# Altium PCB PCB1.PcbDoc
Units mil, origin at the board's own origin, x right, y up, seen from the top; angles counter-clockwise.
Board outline 6000 x 4000 mil, 2 copper layers (Top Layer, Bottom Layer); 45 components, 30 nets, 183 pads, 5 vias.
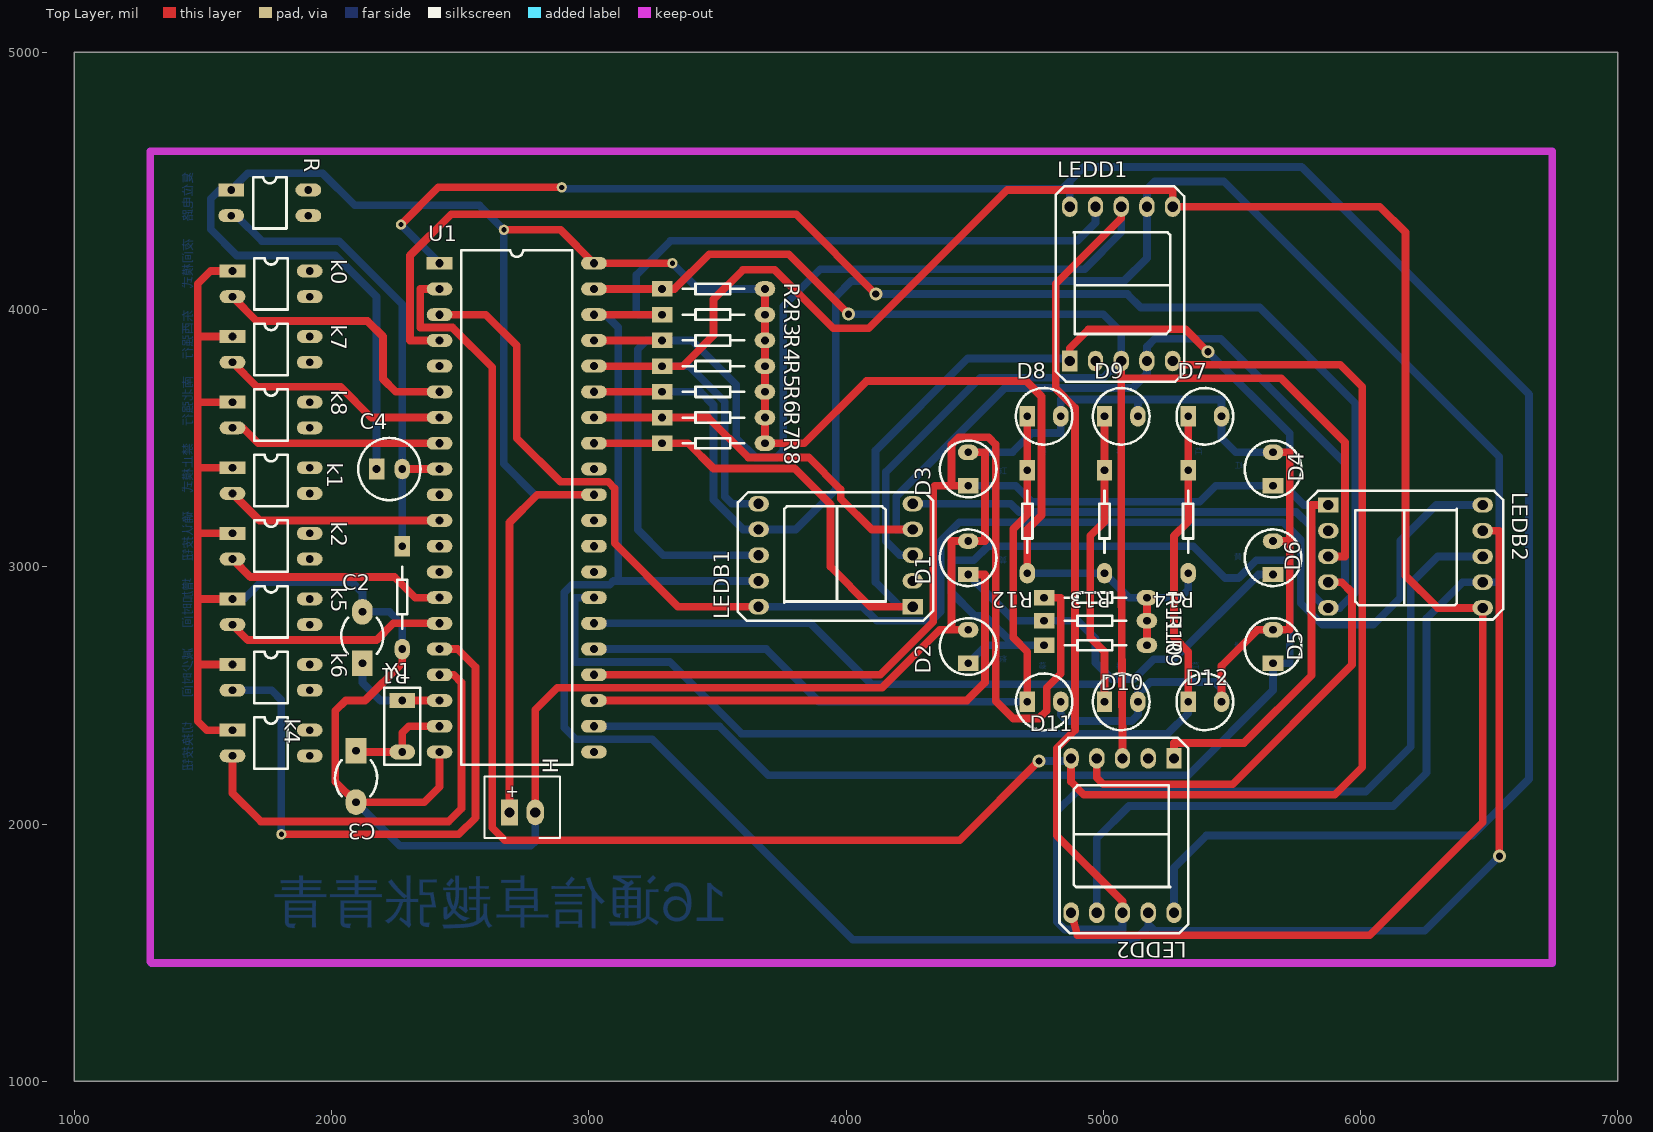
[diagram p0: Top Layer view]
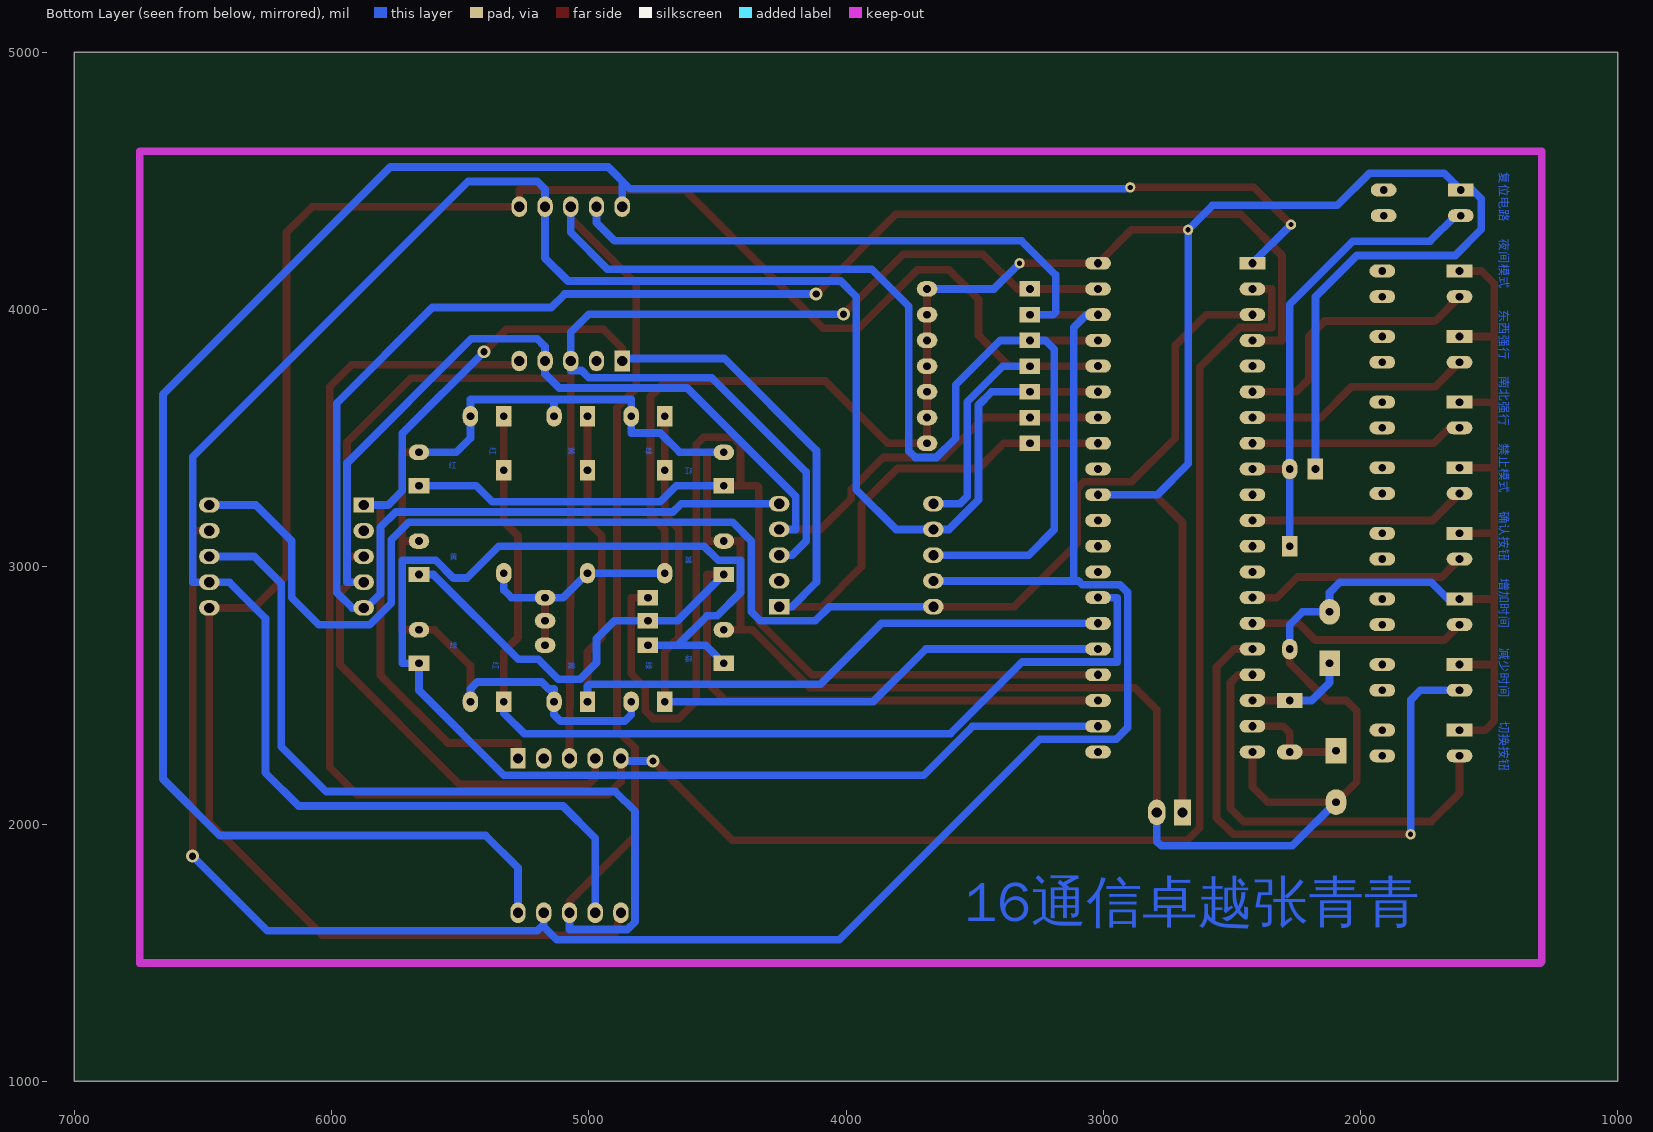
[diagram p1: Bottom Layer view, seen from below]

## Layer stack, top to bottom
Top Solder: solder mask 0.4, Solder Resist, Dk 3.5
Top Layer: signal copper 1.4
Dielectric 1: dielectric 12.6, FR-4, Dk 4.8
Bottom Layer: signal copper 1.4
Bottom Solder: solder mask 0.4, Solder Resist, Dk 3.5

## Board outline
1000,1000 7000,1000 7000,5000 1000,5000

## Design rules (kind name [scope] priority, off if disabled: settings)
Clearance [All] p1: gap=10
PolygonConnect [All] p1: connectstyle=Relief reliefconductorwidth=10 reliefentries=4 polygonreliefangle="90 Angle" airgapwidth=10
RoutingVias [All] p1: holewidth=28 width=50 viastyle="Through Hole" minholewidth=28 minwidth=50 maxholewidth=28 maxwidth=50
SolderMaskExpansion [All] p1: expansion=4
Width [All] p1: maxlimit=30 minlimit=30 preferedwidth=30 minimp=50.000000 maximp=50.000000 favimp=50.000000
30 further rules are at their usual default settings.

## Classes and differential pairs
component class "Backup of Sheet1": C2 C3 C4 D1 D2 D3 D4 D5 D6 D8 D9 D10 D12 H k0 k1 k2 k4 k5 k6 k7 k8 LEDB1 LEDB2 LEDD1 LEDD2 R R1 R2 R3 R4 R5 R6 R7 R8 R9 R10 R11 R12 R13 R14 U1

## Components (designator, comment, footprint, x,y, rotation, side; value= is the part's Value field where it differs from the comment)
C2 "22" C2 2120,2625 r90 top
C3 "22" C2 2095,2285 r270 top
C4 "10uF" C1 2175,3380 r0 top
D1 "Y" LED1 4475,2970 r90 top
D2 "G" LED1 4475,2625 r90 top
D3 "R" LED1 4475,3315 r90 top
D4 "R" LED1 5660,3315 r90 top
D5 "G" LED1 5660,2625 r90 top
D6 "Y" LED1 5660,2970 r90 top
D7 "R" LED1 5330,3585 r0 top
D8 "G" LED1 4705,3585 r0 top
D9 "Y" LED1 5005,3585 r0 top
D10 "Y" LED1 5005,2475 r0 top
D11 "G" LED1 4705,2475 r0 top
D12 "R" LED1 5330,2475 r0 top
H "H2" "2 Found" 2740,2050 r0 top
k0 "SW-PB" DIP4 1615,4150 r0 top
k1 "SW-PB" DIP4 1615,3385 r0 top
k2 "SW-PB" DIP4 1615,3130 r0 top
k4 "SW-PB" DIP4 1615,2365 r0 top
k5 "SW-PB" DIP4 1615,2875 r0 top
k6 "SW-PB" DIP4 1615,2620 r0 top
k7 "SW-PB" DIP4 1615,3895 r0 top
k8 "SW-PB" DIP4 1615,3640 r0 top
LEDB1 "LEDB1" DIP10_1 4160,3145 r180 top
LEDB2 "LEDB2" DIP10_1 5975,2940 r0 top
LEDD1 "LEDD" DIP10_1 5170,3900 r90 top
LEDD2 "LEDD" DIP10_1 4975,2155 r270 top
R "SW-PB" DIP4 1610,4465 r0 top
R1 "10K" RR2 2275,3080 r270 top
R2 "Res1" RR2 3285,4080 r0 top
R3 "Res1" RR2 3285,3980 r0 top
R4 "Res1" RR2 3285,3880 r0 top
R5 "Res1" RR2 3285,3780 r0 top
R6 "Res1" RR2 3285,3680 r0 top
R7 "Res1" RR2 3285,3580 r0 top
R8 "Res1" RR2 3285,3480 r0 top
R9 "Res1" RR2 4770,2695 r0 top
R10 "Res1" RR2 4770,2790 r0 top
R11 "Res1" RR2 4770,2880 r0 top
R12 "Res1" RR2 4705,3375 r270 top
R13 "Res1" RR2 5005,3375 r270 top
R14 "Res1" RR2 5330,3375 r270 top
U1 "STC89C51" DIP40 2420,4180 r0 top
Y1 "11.0592MHz" XLAT 2275,2480 r0 top

## Footprints (in the part's own frame and the unit in brackets; to place one, negate y for a bottom-side part, rotate by r counter-clockwise, add the part's x,y. Pads: shape width x height; smd on the part's side, far side on the other; paste and mask are expansions set on the pad)
"2 Found" [mil]
  rect 66.93x100 hole 39.37: 1(-48,-5)
  oval 66.93x100 hole 39.37: 2(52,-5)
  silkscreen extent -145,-104 148,134
C1 [mil]
  rect 60x80 hole 30: 1(0,0)
  oval 60x80 hole 30: 2(100,0)
  silkscreen extent -71,-121 171,121
C2 [mil] "电容2"
  rect 100x80 hole 30: 1(0,0)
  oval 100x80 hole 30: 2(200,0)
  silkscreen extent 36,-82 177,82
DIP4 [mil]
  rect 100x50 hole 30: 1(0,0)
  oval 100x50 hole 30: 2(0,-100) 3(300,-100) 4(300,0)
  silkscreen extent 85,-150 215,50
DIP10_1 [mil] "单数码管"
  rect 80x60 hole 40: 1(-100,300)
  oval 80x60 hole 40: 2(-100,200) 3(-100,100) 4(-100,0) 5(-100,-100) 6(500,-100) 7(500,0) 8(500,100) 9(500,200) 10(500,300)
  silkscreen extent -180,-145 580,355
DIP40 [mil] "80C51"
  rect 100x50 hole 32: 1(0,0)
  oval 100x50 hole 32: 2(0,-100) 3(0,-200) 4(0,-300) 5(0,-400) 6(0,-500) 7(0,-600) 8(0,-700) 9(0,-800) 10(0,-900) 11(0,-1000) 12(0,-1100) 13(0,-1200) 14(0,-1300) 15(0,-1400) 16(0,-1500) 17(0,-1600) 18(0,-1700) 19(0,-1800) 20(0,-1900) 21(600,-1900) 22(600,-1800) 23(600,-1700) 24(600,-1600) 25(600,-1500) 26(600,-1400) 27(600,-1300) 28(600,-1200) 29(600,-1100) 30(600,-1000) 31(600,-900) 32(600,-800) 33(600,-700) 34(600,-600) 35(600,-500) 36(600,-400) 37(600,-300) 38(600,-200) 39(600,-100) 40(600,0)
  silkscreen extent 85,-1950 515,50
LED1 [mil] "LED_2"
  rect 60x80 hole 30: 1(0,0)
  oval 60x80 hole 30: 2(130,0)
  silkscreen extent -45,-110 175,110
RR2 [mil] "电阻4"
  rect 80x60 hole 30: 1(0,0)
  oval 80x60 hole 30: 2(400,0)
  silkscreen extent 80,-20 320,20
XLAT [mil] "晶振"
  rect 100x60 hole 30: 1(0,0)
  oval 100x60 hole 30: 2(0,-200)
  silkscreen extent -70,-250 70,50

## Part data
C2 C3: library part CAP, "Capacitor"
C4: library part "CAPACITOR POL", "Capacitor"
D1 D2 D3 D4 D5 D6 D7 D8 D9 D10 D11 D12: library part LED1, "LED"
k0 k1 k2 k4 k5 k6 k7 k8 R: "Switch"
LEDB1 LEDB2 LEDD1 LEDD2: library part LED2-.36
R1: library part RES2
R2 R3 R4 R5 R6 R7 R8 R9 R10 R11 R12 R13 R14: "Resistor"
U1: library part AT89C51
Y1: library part CRYSTAL, "Crystal"

## Free pads (board coordinates)
  round 40 hole 20: 0(1805,1960) 0(3325,4180) 1(2670,4310) 2(2270,4330) 3(2895,4475)

## Via types
v1: diameter 50, hole 28, Top Layer to Bottom Layer, 5 vias

## Nets (pads, with @x,y where several pads share a name; then routed paths per layer and width w, separated by ;. In a path a pad name is that pad's centre, name@x,y a point inside that pad or via, vN(x,y) a via of type N, cw(c..) or ccw(c..) an arc to the next point about the centre after c; other vN are vias at no path point)
A: LEDB1.3 LEDB2.3 LEDD1.3 LEDD2.3 R2.1 U1.39 | length 6882
  Top Layer w30: U1.39 R2.1 3333,4080 3468,4215 3777,4215 v1(4010,3982) ; LEDD1.3 5070,3733 ; LEDD2.3 5070,3033 5070,3733 ; LEDB2.3 5940,3040 5940,3484 5691,3733 5070,3733
  Bottom Layer w30: v1(4010,3982) 5000,3982 5070,3912 LEDD1.3 5070,3763 5028,3763 5000,3735 4522,3735 4155,3368 4155,3100 4210,3045 LEDB1.3
B: LEDB1.9 LEDB2.9 LEDD1.9 LEDD2.9 R3.1 U1.38 | length 10357.5
  Top Layer w30: U1.38 R3.1 ; LEDB2.9 6540,3140 v1(6540,1875)
  Bottom Layer w30: U1.38 3065,3980 3115,3930 3115,2945 ; R3.1 3195,3980 3185,3990 3185,4134 3318,4267 4900,4267 4970,4337 LEDD1.9 ; LEDB1.9 3115,2945 ; LEDD2.9 5175,1610 ; v1(6540,1875) 6250,1585 5200,1585 5175,1610 ; 3115,2945 3096,2945 3081,2930 2935,2930 2905,2900 2905,2375 2950,2330 3247,2330 4027,1550 5125,1550 5175,1600 5175,1610
C: LEDB1.8 LEDB2.8 LEDD1.8 LEDD2.8 R4.1 U1.37 | length 10688.1
  Top Layer w30: U1.37 R4.1 ; LEDD1.8 5070,4355 4815,4100 4815,3693 4890,3618 4890,2365 4820,2295 4820,1955 5075,1700 LEDD2.8
  Bottom Layer w30: LEDB1.8 3290,3045 3190,3145 3190,3845 3225,3880 R4.1 3400,3880 3573,3707 3573,3500 3648,3425 3731,3425 3756,3450 3756,4013 3900,4157 4927,4157 5070,4300 LEDD1.8 ; LEDD2.8 5075,1590 4850,1590 4820,1620 4820,2049 4897,2126 6021,2126 6195,2300 6195,2935 6300,3040 LEDB2.8
D: LEDB1.6 LEDB2.6 LEDD1.6 LEDD2.6 R5.1 U1.36 | length 8995.9
  Top Layer w30: U1.36 R5.1 3365,3780 3485,3900 3485,4040 3600,4155 3722,4155 3950,3927 4088.82,3927 4626.82,4465 5270,4465 LEDD1.6 6075,4400 6175,4300 6175,2965 6300,2840 LEDB2.6 6475,2007 6036,1568 4900,1568 LEDD2.6
  Bottom Layer w30: R5.1 3391,3780 3529,3642 3529,3273 3557,3245 LEDB1.6
E: LEDB1.7 LEDB2.7 LEDD1.7 LEDD2.7 R6.1 U1.35 | length 8663.8
  Top Layer w30: U1.35 R6.1
  Bottom Layer w30: R6.1 3434,3680 3485,3629 3485,3260 3600,3145 LEDB1.7 3805,3145 3960,3300 3960,4050 4020.91,4110.91 5080.91,4110.91 5170,4200 LEDD1.7 5170,4468 5200,4498 5469,4498 6540,3427 6540,2940 LEDB2.7 6397,2940 6257,2800 6257,2200 6127,2070 5100,2070 4975,1945 LEDD2.7
F: LEDB1.4 LEDB2.4 LEDD1.4 LEDD2.4 R7.1 U1.34 | length 6082
  Top Layer w30: U1.34 R7.1 3465,3580 3620,3425 3855,3425 3980,3300 3980,3265 4100,3145 LEDB1.4 ; LEDD2.4 4975,2180 5000,2155 5503,2155 5967,2619 5967,2900 5927,2940 LEDB2.4
  Bottom Layer w30: LEDB1.4 4195,3145 4195,3273.18 4616.82,3695 5115,3695 5170,3750 LEDD1.4 5170,3856 5200,3886 5457,3886 5940,3403 5940,2940 LEDB2.4
G: LEDB1.1 LEDB2.1 LEDD1.1 LEDD2.1 R8.1 U1.33 | length 6184.1
  Top Layer w30: U1.33 R8.1 3387,3480 3485,3382 3800,3382 3940,3242 3940,3000 4095,2845 LEDB1.1 ; LEDD1.1 4870,3850 4943,3923 5320,3923 v1(5407,3836) ; LEDD2.1 5275,2315 5547,2315 5810,2578 5810,3240 LEDB2.1
  Bottom Layer w30: LEDB1.1 4210,2845 4115,2940 4115,3452 4473,3810 4870,3810 LEDD1.1 ; v1(5407,3836) 5725,3518 5725,3295 5780,3240 LEDB2.1
G1: D2.1 D5.1 R9.1 U1.22 | length 5622
  Bottom Layer w30: U1.22 3508,2380 3698,2190 5330,2190 5660,2520 D5.1 5725,2625 5725,3025 5595,3025 5526,2956 5474,2956 5350,3080 4552,3080 4497,3025 4410,3025 4410,2900 4500,2810 4540,2810 4655,2695 ; D2.1 4545,2695 4655,2695 ; R9.1 4655,2695
G2: D8.1 D11.1 R12.1 U1.25 | length 2925.5
  Top Layer w30: D11.1 4705,2670 4650,2725 4650,3147 4705,3202 R12.1 D8.1
  Bottom Layer w30: U1.25 3690,2680 3895,2475 D11.1
GND: C2.2 C3.2 D1.2 D2.2 D3.2 D4.2 D5.2 D6.2 D7.2 D8.2 D9.2 D10.2 D11.2 D12.2 H.2 k0.1 k1.1 k2.1 k4.1 k5.1 k6.1 k7.1 k8.1 R1.2 U1.20 | length 12697.2
  Top Layer w30: 1485,2875 k5.1 ; 1485,3895 k7.1 ; 1490,3130 k2.1 ; k4.1 1515,2365 1480,2400 1480,2620 ; k6.1 1480,2620 ; k1.1 1480,3385 ; k8.1 1480,3640 ; k0.1 1530,4150 1480,4100 1480,3640 ; R1.2 2275,2625 2130,2480 2055,2480 2015,2440 2015,2165 C3.2 2360,2085 2420,2145 U1.20 U1.20@2395,2280 ; H.2 2792,2444 2878,2530 4140,2530 4365,2755 4410,2755 ; D2.2 4410,2755 ; D3.2 4540,3445 4540,3100 D1.2 4410,3100 4410,2755 ; D12.2 5460,2615 5600,2755 D5.2 5725,2755 5725,3100 ; D6.2 5725,3100 ; D4.2 5725,3445 5725,3100 ; 1480,2620 1480,3385 ; 1480,3385 1480,3640
  Bottom Layer w30: k5.1 1660,2875 1725,2940 2080,2940 2120,2900 C2.2 2225,2825 2275,2775 R1.2 ; C3.2 2265,1915 2775,1915 2792,1932 H.2 ; D3.2 4647,3445 4722,3520 4835,3520 D8.2 4835,3650 5135,3650 ; D11.2 4835,2425 4860,2400 5110,2400 5135,2425 D10.2 5135,2525 5155.6,2525 5182.6,2552 5433,2552 5460,2525 D12.2 ; D9.2 5135,3650 ; D4.2 5515,3445 5460,3500 D7.2 5460,3650 5135,3650
NetC2_1: C2.1 U1.18 Y1.1 | length 404
  Top Layer w30: Y1.1 U1.18
  Bottom Layer w30: C2.1 2120,2550 2190,2480 Y1.1
NetC3_1: C3.1 U1.19 Y1.2 | length 415.4
  Top Layer w30: C3.1@2095,2280 Y1.2 2275,2355 2300,2380 U1.19
  Bottom Layer w30: C3.1@2095,2280 C3.1
NetC4_2: C4.2 R1.1 R.2 U1.9 | length 1892.9
  Top Layer w30: C4.2 U1.9
  Bottom Layer w30: R.2 1630,4365 1730,4265 2030,4265 2275,4020 C4.2 R1.1
Netk0_2: k0.2 U1.6 | length 1054.9
  Top Layer w30: k0.2 1710,3955 2140,3955 2200,3895 2200,3730 2250,3680 U1.6
Netk1_2: k1.2 U1.11 | length 848.5
  Top Layer w30: k1.2 1720,3180 U1.11
Netk2_2: k2.2 U1.14 | length 867.1
  Top Layer w30: k2.2 1685,2960 2245,2960 2325,2880 U1.14
Netk4_2: k4.2 U1.17 | length 1688.7
  Top Layer w30: k4.2 1615,2120 1725,2010 2455,2010 2505,2060 2505,2550 2475,2580 U1.17
Netk5_2: k5.2 U1.15 | length 856.8
  Top Layer w30: k5.2 1675,2715 2175,2715 2240,2780 U1.15
Netk6_2: k6.2 pad.0@1805,1960 U1.16 | length 2263.7
  Top Layer w30: pad.0@1805,1960 2495,1960 2560,2025 2560,2610 2490,2680 U1.16
  Bottom Layer w30: k6.2 1767,2520 1805,2482 pad.0@1805,1960
Netk7_2: k7.2 U1.7 | length 894.1
  Top Layer w30: k7.2 1710,3700 2035,3700 2155,3580 U1.7
Netk8_2: k8.2 U1.8 | length 829.9
  Top Layer w30: k8.2 1655,3540 1715,3480 U1.8
R1: D3.1 D4.1 R11.1 U1.24 | length 5420.2
  Top Layer w30: U1.24 4133,2580 4339,2786 4339,3308 4346,3315 4410,3315 ; D3.1 4410,3315 ; R11.1 4835,2880 4835,2584 4780,2529 4780,2440 4750,2410 4650,2410 4582,2478 4582,3475 4554,3503 4438,3503 4410,3475 4410,3315
  Bottom Layer w30: D3.1 4660,3315 4722,3253 5375,3253 5437,3315 D4.1
R2: D7.1 D12.1 R14.1 U1.27 | length 4058.3
  Top Layer w30: D12.1 5330,2670 5275,2725 5275,3120 5330,3175 R14.1 D7.1
  Bottom Layer w30: U1.27 2945,2880 2945,2630 3315,2630 3594,2351 5250,2351 5330,2431 D12.1
S1: LEDD1.10 LEDD2.10 pad.2 pad.3 U1.1 | length 8331.1
  Top Layer w30: pad.2 2415,4475 pad.3@2880,4475 ; LEDD1.10 LEDD1.10@4870,4415
  Bottom Layer w30: pad.2@2265,4330 pad.2 U1.1 ; pad.3@2910,4470 4840,4470 4924,4554 5771,4554 6655,3670 6655,2175 6435,1955 5400,1955 5275,1830 LEDD2.10 ; LEDD1.10 4870,4490
S2: LEDD1.5 LEDD2.5 U1.2 | length 8319.9
  Top Layer w30: U1.2 2345,4080 2345,3930 2470,3930 2625,3775 2625,1986 2674,1937 4442,1937 v1(4750,2245) ; LEDD2.5 4875,2164 4925,2114 5900,2114 6007,2221 6007,3700 5921.37,3785.63 5270,3785.63 LEDD1.5
  Bottom Layer w30: v1(4750,2245) 4875,2245 LEDD2.5
S3: LEDB1.10 LEDB2.10 U1.3 | length 5834.3
  Top Layer w30: U1.3 2600,3980 2720,3860 2720,3500 2890,3330 3075,3330 3101,3304 3101,3091 3347,2845 LEDB1.10
  Bottom Layer w30: LEDB1.10 4064,2845 4119,2790 4333,2790 4368,2825 4368,3100 4441,3173 5700,3173 5768,3105 5768,2858 5851,2775 6050,2775 6155,2880 6155,3100 6295,3240 LEDB2.10
S4: LEDB1.5 LEDB2.5 U1.4 | length 7290
  Top Layer w30: U1.4 2305,3880 2305,4210 2465,4370 3806,4370 v1(4116,4060)
  Bottom Layer w30: v1(4116,4060) 5094,4060 5146,4008 5608,4008 5980,3636 5980,2900 5920,2840 LEDB2.5 5865,2840 5810,2895 5810,3153 5750,3213 4673,3213 4641,3245 LEDB1.5
VCC: C4.1 H.1 pad.0@3325,4180 pad.1 R2.2 R3.2 R4.2 R5.2 R6.2 R7.2 R8.2 R9.2 R10.2 R11.2 R12.2 R13.2 R14.2 R.1 U1.31 U1.40 | length 10170.6
  Top Layer w30: pad.1 2890,4310 U1.40 pad.0@3325,4180 ; H.1 2692,3172 2800,3280 U1.31 ; R2.2 R3.2 R4.2 R5.2 R6.2 R7.2 R8.2 3838,3480 4080,3722 4700,3722 4760,3662 4760,3200 4705,3145 R12.2 ; R9.2 R10.2 R11.2
  Bottom Layer w30: C4.1 2175,4050 2015,4210 1631.67,4210 1530,4311.67 1530,4430 1565,4465 R.1 1675,4530 1965,4530 2090,4405 2575,4405 pad.1 ; pad.1@2669,4309 2669,3400 2789,3280 U1.31 ; pad.0@3325,4180 3425,4080 R2.2 ; R12.2 R13.2 5100,2880 R11.2 5300,2880 5330,2910 R14.2
Y1: D1.1 D6.1 R10.1 U1.23 | length 3610.6
  Top Layer w30: U1.23 4470,2480 4540,2550 4540,2970 D1.1
  Bottom Layer w30: D1.1 4655,2790 R10.1 4900,2790 4970,2720 4970,2627 5034,2563 5119,2563 5196,2640 5273.98,2640 5603.98,2970 D6.1
Y2: D9.1 D10.1 R13.1 U1.26 | length 3302
  Top Layer w30: D10.1 5005,2670 4950,2725 4950,3120 5005,3175 R13.1 D9.1
  Bottom Layer w30: U1.26 3862,2780 4099,2543 4997,2543 5005,2535 D10.1
pads on no net: k0.3 k0.4 k1.3 k1.4 k2.3 k2.4 k4.3 k4.4 k5.3 k5.4 k6.3 k6.4 k7.3 k7.4 k8.3 k8.4 LEDB1.2 LEDB2.2 LEDD1.2 LEDD2.2 R.3 R.4 U1.5 U1.10 U1.12 U1.13 U1.21 U1.28 U1.29 U1.30 U1.32

## Keep-outs
Keep-Out Layer:
  lines w30: 6690,4615 6745,4615 6745,4570 6745,1460 1300,1460 1295,1465 1295,4510 1295,4615 1385,4615 6700,4615

## Other copper
Bottom Layer:
  text "复位电路" at 1470,4535 h60 r90
  text "夜间模式" at 1470,4275 h60 r90
  text "东西强行" at 1470,4000 h60 r90
  text "南北强行" at 1470,3740 h60 r90
  text "禁止模式" at 1470,3480 h60 r90
  text "绿" at 4785,3465 h40 r90
  text "黄" at 5085,3465 h40 r90
  text "红" at 5390,3465 h40 r90
  text "红" at 4595,3390 h40 r180
  text "红" at 5545,3375 h40
  text "确认按钮" at 1470,3215 h60 r90
  text "黄" at 4595,3045 h40 r180
  text "黄" at 5540,3020 h40
  text "增加时间" at 1470,2955 h60 r90
  text "减少时间" at 1470,2685 h60 r90
  text "绿" at 5540,2675 h40
  text "绿" at 4595,2660 h40 r180
  text "绿" at 4785,2630 h40 r90
  text "黄" at 5085,2630 h40 r90
  text "红" at 5380,2630 h40 r90
  text "切换按钮" at 1470,2400 h60 r90
  text "16通信卓越张青青" at 3540,1570 h270

## Text inside footprints (layer, text, board x,y; h text height)
H: Top Overlay "+" at 2677,2104 h45.28